# Altium PCB breakout.PcbDoc
Units mm, origin at the board's own origin, x right, y up, seen from the top; angles counter-clockwise.
Board outline 99.9 x 100 mm, 2 copper layers (Top Layer, Bottom Layer); 20 components, 80 nets, 180 pads, 0 vias.
Unrouted connection lines stored in the file: 80.
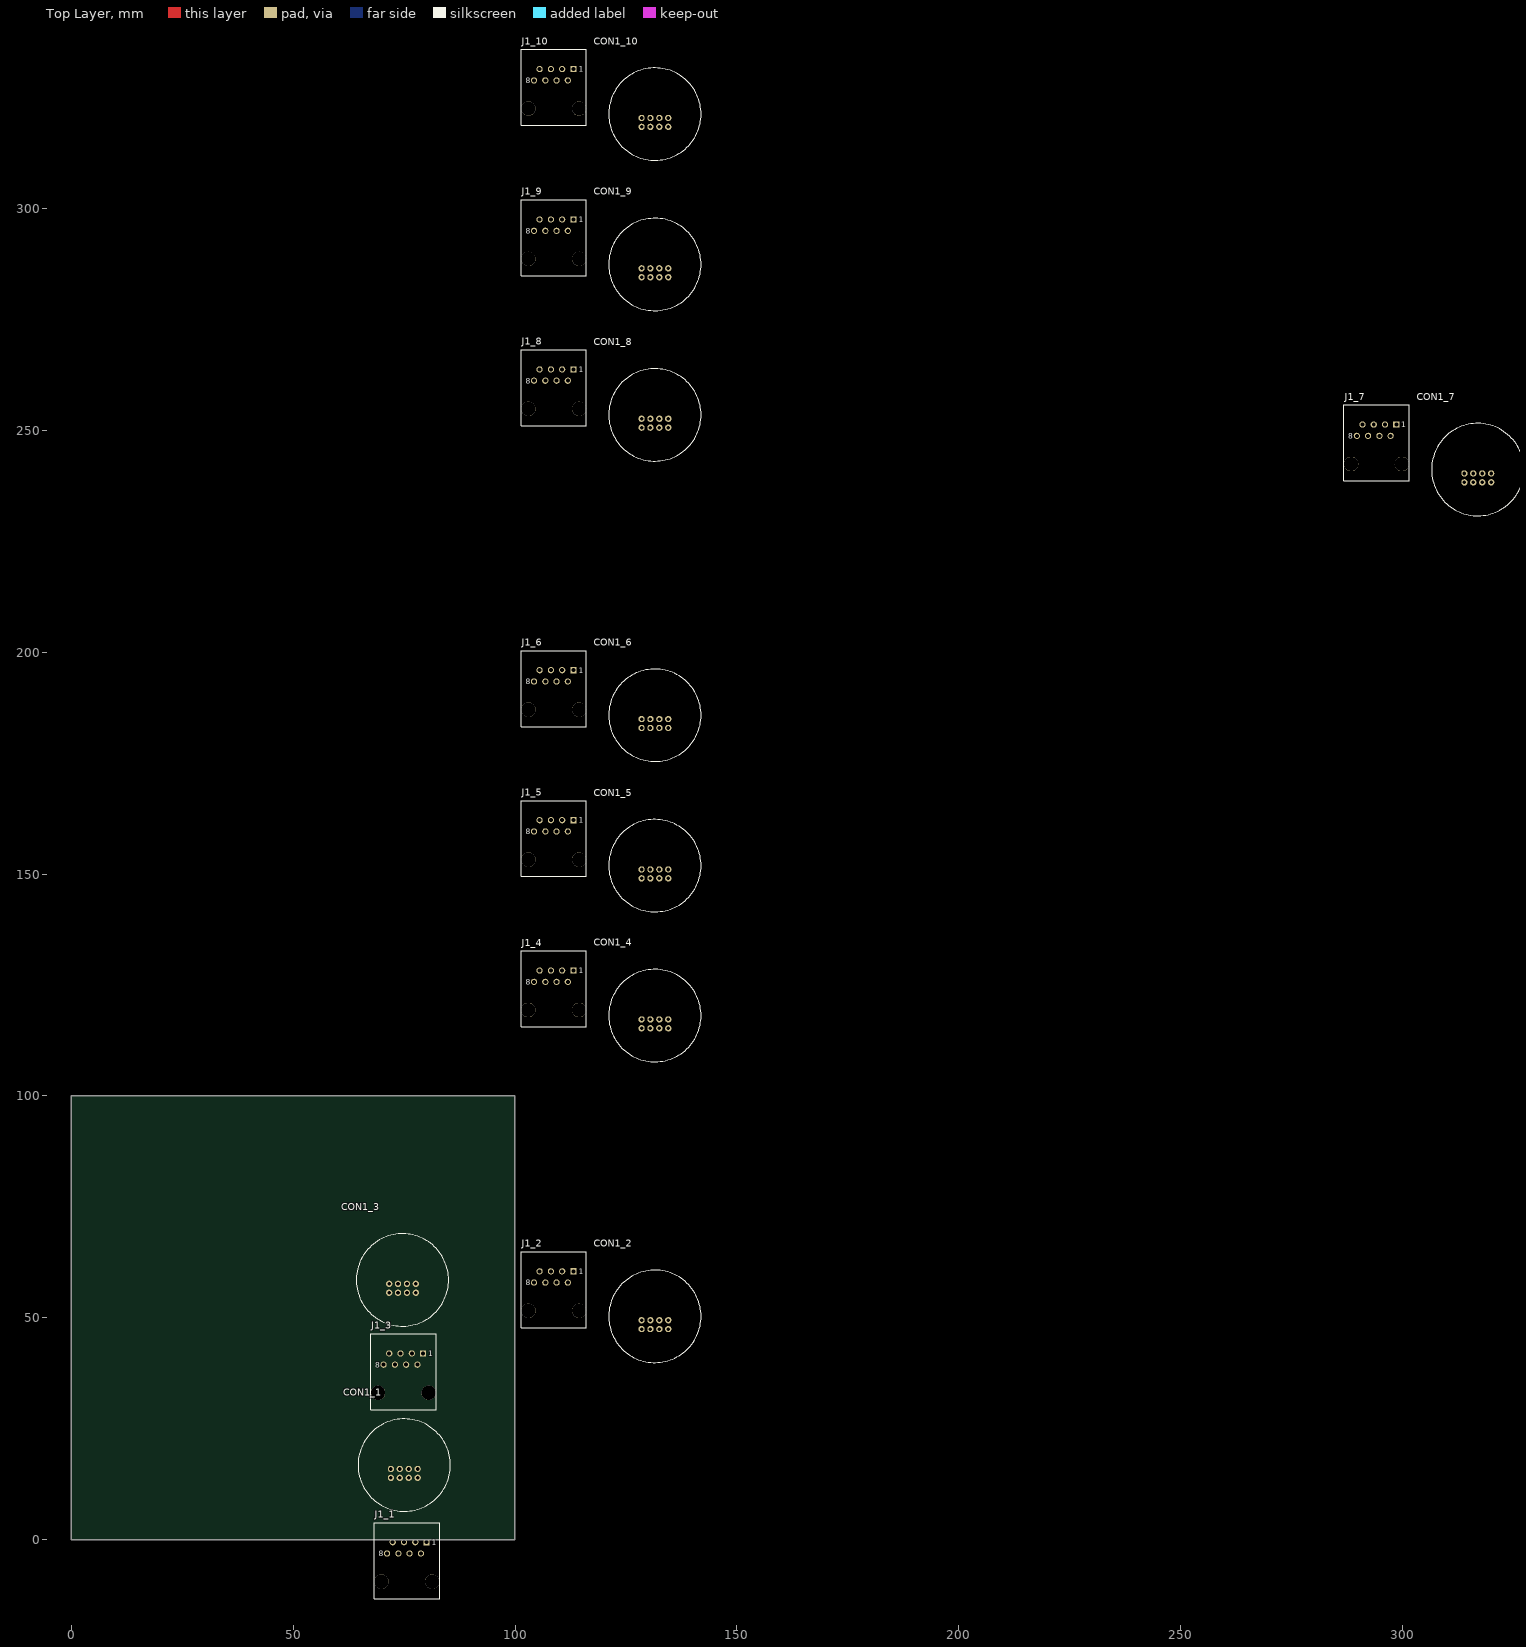
[diagram p0: Top Layer view]
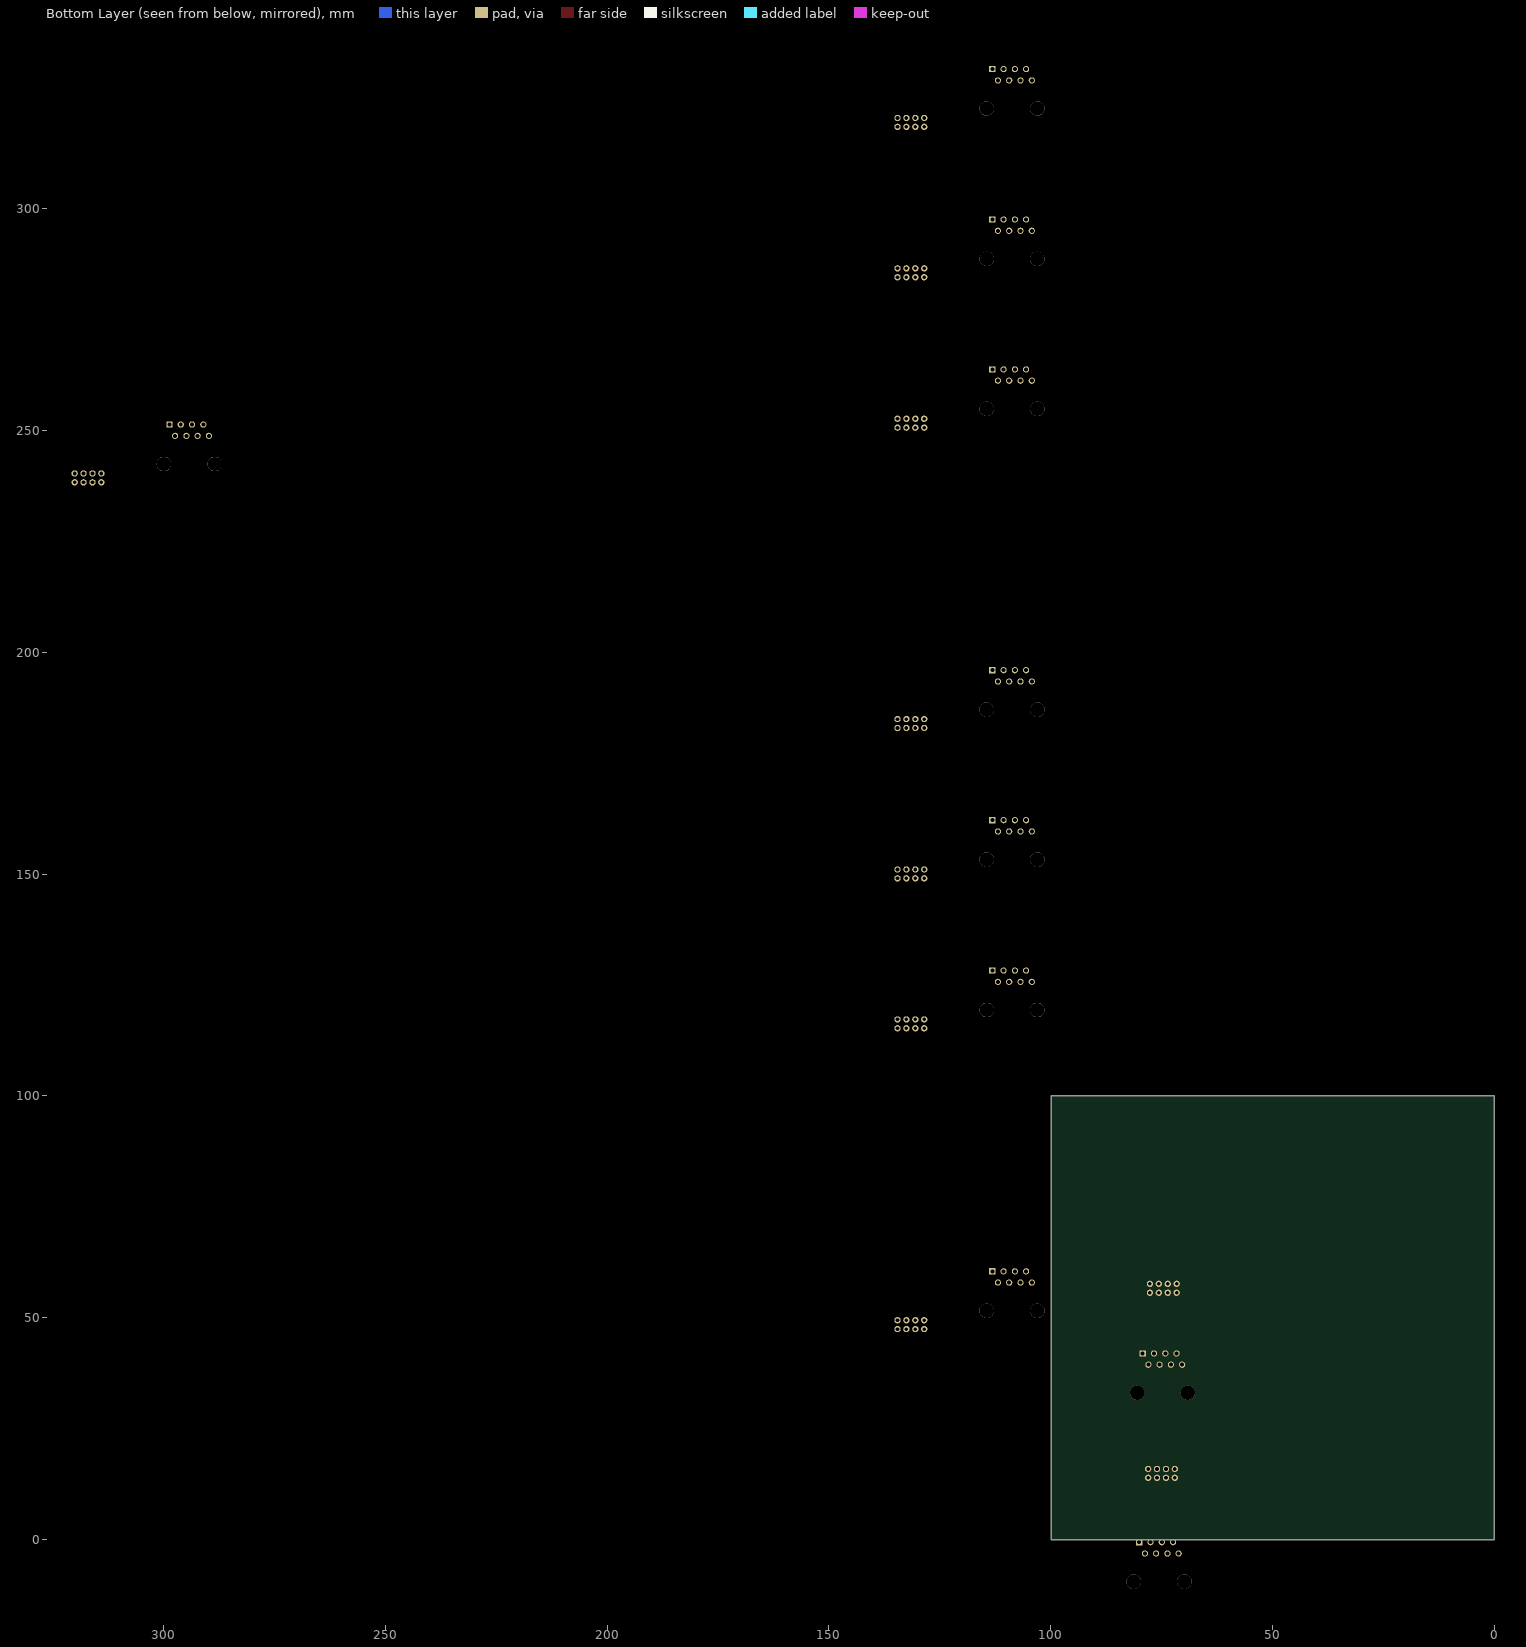
[diagram p1: Bottom Layer view, seen from below]

## Layer stack, top to bottom
Top Solder: solder mask 0.0102, Solder Resist, Dk 3.5
Top Layer: signal copper 0.0356
Dielectric 1: dielectric 0.32, FR-4, Dk 4.8
Bottom Layer: signal copper 0.0356
Bottom Solder: solder mask 0.0102, Solder Resist, Dk 3.5

## Board outline
0,0 99.9,0 99.9,100 0,100

## Design rules (kind name [scope] priority, off if disabled: settings)
Clearance [All] p1: gap=0.254 ignorepadtopadclearanceinfootprint=FALSE except(0: Arc-Hole Track-Hole SMDPad-Hole THPad-Hole Via-Hole Fill-Hole Poly-Hole Region-Hole Text-Hole)
PolygonConnect [All] p1: connectstyle=Relief reliefconductorwidth=0.254 reliefentries=4 polygonreliefangle="90 Angle" airgapwidth=0.254
RoomDefinition 10 [InComponentClass('10')] p1: confinementstyle=ConfineIn formatcopy=TRUE lockcomponents=FALSE outline 101,306.399 145.7,306.399 145.7,338.899 101,338.899
RoomDefinition 9 [InComponentClass('9')] p2: confinementstyle=ConfineIn formatcopy=TRUE lockcomponents=FALSE outline 101,272.499 145.7,272.499 145.7,304.999 101,304.999
RoomDefinition 8 [InComponentClass('8')] p3: confinementstyle=ConfineIn formatcopy=TRUE lockcomponents=FALSE outline 101,238.599 145.7,238.599 145.7,271.199 101,271.199
RoomDefinition 6 [InComponentClass('6')] p4: confinementstyle=ConfineIn formatcopy=TRUE lockcomponents=FALSE outline 101,170.9 145.7,170.9 145.7,203.4 101,203.4
RoomDefinition 5 [InComponentClass('5')] p5: confinementstyle=ConfineIn formatcopy=TRUE lockcomponents=FALSE outline 101,137 145.7,137 145.7,169.6 101,169.6
RoomDefinition 4 [InComponentClass('4')] p6: confinementstyle=ConfineIn formatcopy=TRUE lockcomponents=FALSE outline 101,103.2 145.7,103.2 145.7,135.7 101,135.7
RoomDefinition 2 [InComponentClass('2')] p7: confinementstyle=ConfineIn formatcopy=TRUE lockcomponents=FALSE outline 101,35.4 145.7,35.4 145.7,67.9 101,67.9
RoomDefinition 1 [InComponentClass('1')] p8: confinementstyle=ConfineIn formatcopy=TRUE lockcomponents=FALSE outline 101,1.6 145.7,1.6 145.7,34.1 101,34.1
RoomDefinition 7 [InComponentClass('7')] p9: confinementstyle=ConfineIn formatcopy=TRUE lockcomponents=FALSE outline 295.178,71.07 339.878,71.07 339.878,103.37 295.178,103.37
RoutingVias [All] p1: holewidth=0.711 width=1.27 viastyle="Through Hole" minholewidth=0.711 minwidth=1.27 maxholewidth=0.711 maxwidth=1.27
SolderMaskExpansion [All] p1: expansion=0.102
Width [All] p1: maxlimit=0.254 minlimit=0.254 preferedwidth=0.254
30 further rules are at their usual default settings.

## Classes and differential pairs
channel class rj45_breakout: 1 2 3 4 5 6 7 8 9 10
component class 10: CON1_10 J1_10
component class 9: CON1_9 J1_9
component class 8: CON1_8 J1_8
component class 7: CON1_7 J1_7
component class 6: CON1_6 J1_6
component class 5: CON1_5 J1_5
component class 4: CON1_4 J1_4
component class 3: CON1_3 J1_3
component class 2: CON1_2 J1_2
component class 1: CON1_1 J1_1

## Components (designator, comment, footprint, x,y, rotation, side; value= is the part's Value field where it differs from the comment)
CON1_1 "RJ45" RJ45-CHASSISCONNECTOR 75,16.77 r0 top (schematic designator CON1)
CON1_2 "RJ45" RJ45-CHASSISCONNECTOR 131.5,50.3 r0 top (schematic designator CON1)
CON1_3 "RJ45" RJ45-CHASSISCONNECTOR 74.6,58.5 r0 top (schematic designator CON1)
CON1_4 "RJ45" RJ45-CHASSISCONNECTOR 131.5,118.1 r0 top (schematic designator CON1)
CON1_5 "RJ45" RJ45-CHASSISCONNECTOR 131.5,151.9 r0 top (schematic designator CON1)
CON1_6 "RJ45" RJ45-CHASSISCONNECTOR 131.5,185.8 r0 top (schematic designator CON1)
CON1_7 "RJ45" RJ45-CHASSISCONNECTOR 316.977,241.17 r0 top (schematic designator CON1)
CON1_8 "RJ45" RJ45-CHASSISCONNECTOR 131.5,253.499 r0 top (schematic designator CON1)
CON1_9 "RJ45" RJ45-CHASSISCONNECTOR 131.5,287.399 r0 top (schematic designator CON1)
CON1_10 "RJ45" RJ45-CHASSISCONNECTOR 131.5,321.299 r0 top (schematic designator CON1)
J1_1 "615008142521" 615008142521 75.585,-5.055 r0 top (schematic designator J1)
J1_2 "615008142521" 615008142521 108.7,56 r0 top (schematic designator J1)
J1_3 "615008142521" 615008142521 74.8,37.5 r0 top (schematic designator J1)
J1_4 "615008142521" 615008142521 108.7,123.8 r0 top (schematic designator J1)
J1_5 "615008142521" 615008142521 108.7,157.7 r0 top (schematic designator J1)
J1_6 "615008142521" 615008142521 108.7,191.5 r0 top (schematic designator J1)
J1_7 "615008142521" 615008142521 294.177,246.87 r0 top (schematic designator J1)
J1_8 "615008142521" 615008142521 108.7,259.299 r0 top (schematic designator J1)
J1_9 "615008142521" 615008142521 108.7,293.099 r0 top (schematic designator J1)
J1_10 "615008142521" 615008142521 108.7,326.999 r0 top (schematic designator J1)

## Footprints (in the part's own frame and the unit in brackets; to place one, negate y for a bottom-side part, rotate by r counter-clockwise, add the part's x,y. Pads: shape width x height; smd on the part's side, far side on the other; paste and mask are expansions set on the pad)
615008142521 [mm] "45° Plastic 1x1 TH    8P8C"
  rect 1.4x1.4 hole 0.9: 1(4.445,4.445)
  round 1.4 hole 0.9: 2(3.175,1.905) 3(1.905,4.445) 4(0.635,1.905) 5(-0.635,4.445) 6(-1.905,1.905) 7(-3.175,4.445) 8(-4.445,1.905)
  round 3.25 hole 3.25 unplated: ""(-5.715,-4.445) ""(5.715,-4.445)
  silkscreen extent -7.37,-8.25 7.37,8.86, body extent -7.37,-8.25 7.38,8.86, height 20.4
RJ45-CHASSISCONNECTOR [mil]
  round 56 hole 32: 1(119,-112.99) 2(119,-34.25) 3(40,-112.99) 4(40,-34.25) 5(-39.37,-112.99) 6(-39.37,-34.25) 7(-118.11,-112.99) 8(-118.11,-34.25)
  silkscreen extent -410,-410 410,410, body extent -551,-531 551,571, height 758

## Part data
CON1_1 CON1_2 CON1_3 CON1_4 CON1_5 CON1_6 CON1_7 CON1_8 CON1_9 CON1_10: library part RJ45-TOP, Part_Group_Name=connector, Part Number=RJ45-TOP, Placement_Type=1
J1_1 J1_2 J1_3 J1_4 J1_5 J1_6 J1_7 J1_8 J1_9 J1_10: ComponentLink1Description=Manufacturer, ComponentLink1URL=http://www.we-online.de, ComponentLink2Description=Datasheet, ComponentLink2URL=http://katalog.we-online.de/em/datasheet/615008142521.pdf, Part_Group_Name=connector, Part Number=615008142521, PartNumber=615008142521, PinNumber=8P8C, Placement_Type=4, PublishedDate="July 2016", Publisher="Wurth Elektronik"

## Nets (pads, with @x,y where several pads share a name; then routed paths per layer and width w, separated by ;. In a path a pad name is that pad's centre, name@x,y a point inside that pad or via, vN(x,y) a via of type N, cw(c..) or ccw(c..) an arc to the next point about the centre after c; other vN are vias at no path point)
NetCON1_1_1: CON1_1.1 J1_1.1
NetCON1_1_2: CON1_1.2 J1_1.2
NetCON1_1_3: CON1_1.3 J1_1.3
NetCON1_1_4: CON1_1.4 J1_1.4
NetCON1_1_5: CON1_1.5 J1_1.5
NetCON1_1_6: CON1_1.6 J1_1.6
NetCON1_1_7: CON1_1.7 J1_1.7
NetCON1_1_8: CON1_1.8 J1_1.8
NetCON1_2_1: CON1_2.1 J1_2.1
NetCON1_2_2: CON1_2.2 J1_2.2
NetCON1_2_3: CON1_2.3 J1_2.3
NetCON1_2_4: CON1_2.4 J1_2.4
NetCON1_2_5: CON1_2.5 J1_2.5
NetCON1_2_6: CON1_2.6 J1_2.6
NetCON1_2_7: CON1_2.7 J1_2.7
NetCON1_2_8: CON1_2.8 J1_2.8
NetCON1_3_1: CON1_3.1 J1_3.1
NetCON1_3_2: CON1_3.2 J1_3.2
NetCON1_3_3: CON1_3.3 J1_3.3
NetCON1_3_4: CON1_3.4 J1_3.4
NetCON1_3_5: CON1_3.5 J1_3.5
NetCON1_3_6: CON1_3.6 J1_3.6
NetCON1_3_7: CON1_3.7 J1_3.7
NetCON1_3_8: CON1_3.8 J1_3.8
NetCON1_4_1: CON1_4.1 J1_4.1
NetCON1_4_2: CON1_4.2 J1_4.2
NetCON1_4_3: CON1_4.3 J1_4.3
NetCON1_4_4: CON1_4.4 J1_4.4
NetCON1_4_5: CON1_4.5 J1_4.5
NetCON1_4_6: CON1_4.6 J1_4.6
NetCON1_4_7: CON1_4.7 J1_4.7
NetCON1_4_8: CON1_4.8 J1_4.8
NetCON1_5_1: CON1_5.1 J1_5.1
NetCON1_5_2: CON1_5.2 J1_5.2
NetCON1_5_3: CON1_5.3 J1_5.3
NetCON1_5_4: CON1_5.4 J1_5.4
NetCON1_5_5: CON1_5.5 J1_5.5
NetCON1_5_6: CON1_5.6 J1_5.6
NetCON1_5_7: CON1_5.7 J1_5.7
NetCON1_5_8: CON1_5.8 J1_5.8
NetCON1_6_1: CON1_6.1 J1_6.1
NetCON1_6_2: CON1_6.2 J1_6.2
NetCON1_6_3: CON1_6.3 J1_6.3
NetCON1_6_4: CON1_6.4 J1_6.4
NetCON1_6_5: CON1_6.5 J1_6.5
NetCON1_6_6: CON1_6.6 J1_6.6
NetCON1_6_7: CON1_6.7 J1_6.7
NetCON1_6_8: CON1_6.8 J1_6.8
NetCON1_7_1: CON1_7.1 J1_7.1
NetCON1_7_2: CON1_7.2 J1_7.2
NetCON1_7_3: CON1_7.3 J1_7.3
NetCON1_7_4: CON1_7.4 J1_7.4
NetCON1_7_5: CON1_7.5 J1_7.5
NetCON1_7_6: CON1_7.6 J1_7.6
NetCON1_7_7: CON1_7.7 J1_7.7
NetCON1_7_8: CON1_7.8 J1_7.8
NetCON1_8_1: CON1_8.1 J1_8.1
NetCON1_8_2: CON1_8.2 J1_8.2
NetCON1_8_3: CON1_8.3 J1_8.3
NetCON1_8_4: CON1_8.4 J1_8.4
NetCON1_8_5: CON1_8.5 J1_8.5
NetCON1_8_6: CON1_8.6 J1_8.6
NetCON1_8_7: CON1_8.7 J1_8.7
NetCON1_8_8: CON1_8.8 J1_8.8
NetCON1_9_1: CON1_9.1 J1_9.1
NetCON1_9_2: CON1_9.2 J1_9.2
NetCON1_9_3: CON1_9.3 J1_9.3
NetCON1_9_4: CON1_9.4 J1_9.4
NetCON1_9_5: CON1_9.5 J1_9.5
NetCON1_9_6: CON1_9.6 J1_9.6
NetCON1_9_7: CON1_9.7 J1_9.7
NetCON1_9_8: CON1_9.8 J1_9.8
NetCON1_10_1: CON1_10.1 J1_10.1
NetCON1_10_2: CON1_10.2 J1_10.2
NetCON1_10_3: CON1_10.3 J1_10.3
NetCON1_10_4: CON1_10.4 J1_10.4
NetCON1_10_5: CON1_10.5 J1_10.5
NetCON1_10_6: CON1_10.6 J1_10.6
NetCON1_10_7: CON1_10.7 J1_10.7
NetCON1_10_8: CON1_10.8 J1_10.8
pads on no net: J1_1. J1_2. J1_3. J1_4. J1_5. J1_6. J1_7. J1_8. J1_9. J1_10.

## Text inside footprints (layer, text, board x,y; h text height)
CON1_1: Mechanical 14 "front" at 73.3,4.67 h1.97
CON1_2: Mechanical 14 "front" at 129.8,38.2 h1.97
CON1_3: Mechanical 14 "front" at 72.9,46.4 h1.97
CON1_4: Mechanical 14 "front" at 129.8,106 h1.97
CON1_5: Mechanical 14 "front" at 129.8,139.8 h1.97
CON1_6: Mechanical 14 "front" at 129.8,173.7 h1.97
CON1_7: Mechanical 14 "front" at 315.277,229.07 h1.97
CON1_8: Mechanical 14 "front" at 129.8,241.399 h1.97
CON1_9: Mechanical 14 "front" at 129.8,275.299 h1.97
CON1_10: Mechanical 14 "front" at 129.8,309.199 h1.97
J1_1: Top Overlay "8" at 69.235,-3.785 h1.27; Top Overlay "1" at 81.173,-1.245 h1.27
J1_2: Top Overlay "8" at 102.35,57.27 h1.27; Top Overlay "1" at 114.288,59.81 h1.27
J1_3: Top Overlay "8" at 68.45,38.77 h1.27; Top Overlay "1" at 80.388,41.31 h1.27
J1_4: Top Overlay "8" at 102.35,125.07 h1.27; Top Overlay "1" at 114.288,127.61 h1.27
J1_5: Top Overlay "8" at 102.35,158.97 h1.27; Top Overlay "1" at 114.288,161.51 h1.27
J1_6: Top Overlay "8" at 102.35,192.77 h1.27; Top Overlay "1" at 114.288,195.31 h1.27
J1_7: Top Overlay "8" at 287.827,248.14 h1.27; Top Overlay "1" at 299.765,250.68 h1.27
J1_8: Top Overlay "8" at 102.35,260.569 h1.27; Top Overlay "1" at 114.288,263.109 h1.27
J1_9: Top Overlay "8" at 102.35,294.369 h1.27; Top Overlay "1" at 114.288,296.909 h1.27
J1_10: Top Overlay "8" at 102.35,328.269 h1.27; Top Overlay "1" at 114.288,330.809 h1.27